# Altium PCB UKU208_.PcbDoc
Units mm, origin at the board's own origin, x right, y up, seen from the top; angles counter-clockwise.
Board outline 222.4 x 162.3 mm, 2 copper layers (Top Layer, Bottom Layer); 42 components, 78 nets, 138 pads, 0 vias.
Unrouted connection lines stored in the file: 93.
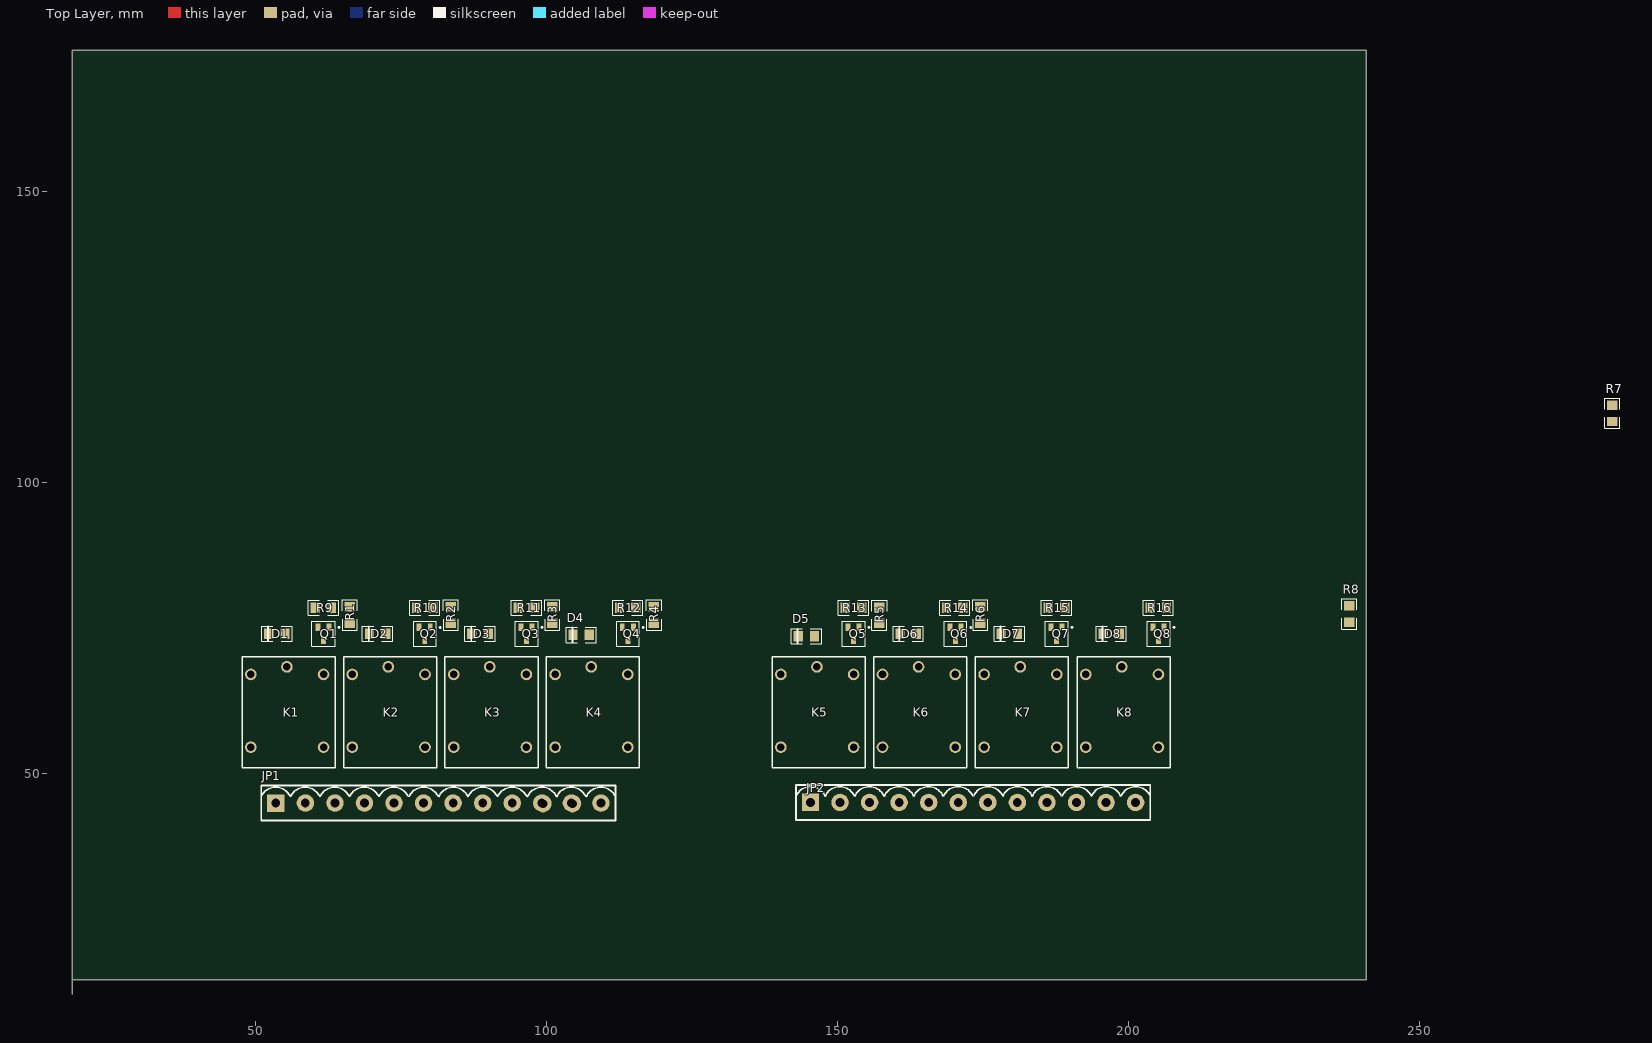
[diagram p0: Top Layer view]
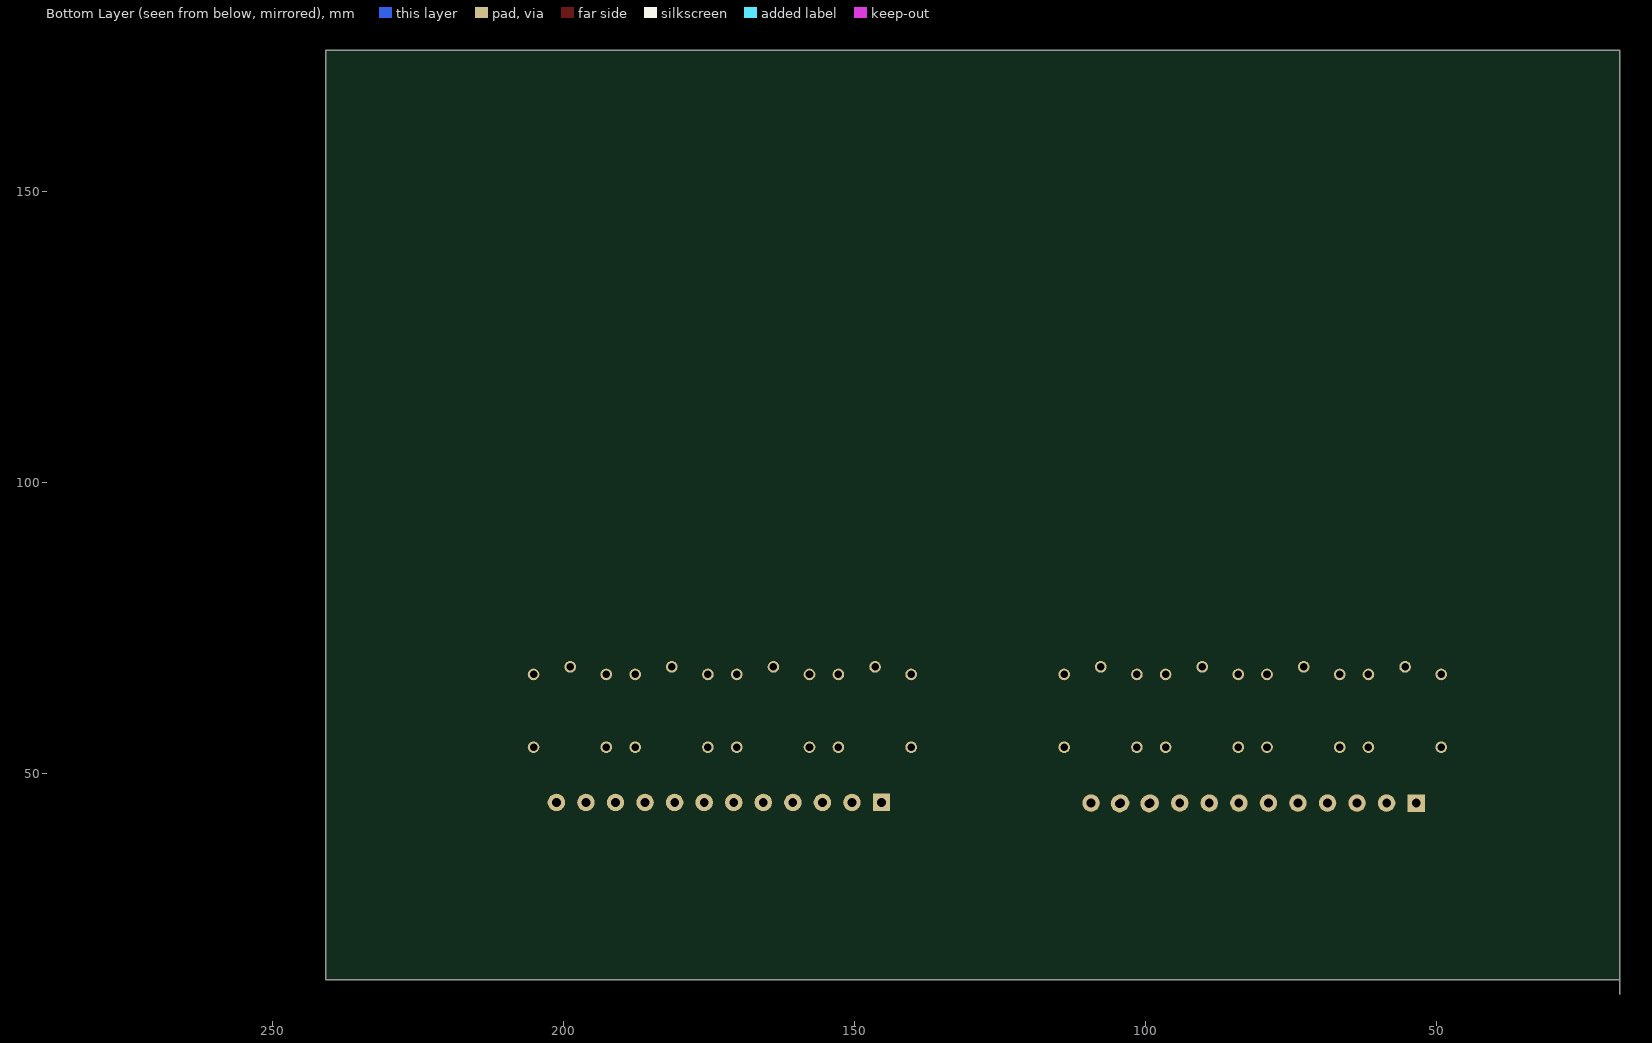
[diagram p1: Bottom Layer view, seen from below]

## Layer stack, top to bottom
Top Layer: signal copper 0.0356
Dielectric: dielectric 0.32, FR-4, Dk 4.8
Bottom Layer: signal copper 0.0356

## Board outline
18.5,12 18.5,174.3 240.9,174.3 240.9,14.5 18.5,14.5

## Design rules (kind name [scope] priority, off if disabled: settings)
Clearance [All] p1: gap=0.254
ComponentClearance [All] p1: gap=0.254 collisioncheckmode=0
PolygonConnect [All] p1: connectstyle=Relief reliefconductorwidth=0.254 reliefentries=4 polygonreliefangle="90 Angle"
RoomDefinition UKU208_main [InComponentClass('UKU208_main')] p1: confinementstyle=ConfineIn formatcopy=TRUE outline 0,0 50.8,0 50.8,25.4 0,25.4
RoutingLayers [All] p1: top layer=Horizontal bottom layer=Vertical
RoutingVias [All] p1: holewidth=0.711 width=1.27 viastyle="Through Hole" minholewidth=0.711 minwidth=1.27 maxholewidth=0.711 maxwidth=1.27
SolderMaskExpansion [All] p1: expansion=0.102
TestPointUsage [All] p1: valid=0 allowmultiple=FALSE
Testpoint [All] p1: side=15 testpointundercomponent=TRUE minsize=1.016 maxsize=2.54 preferedsize=1.524 minholesize=0 maxholesize=1.016 preferedholesize=0.813 testpointgrid=0.025 style=1023 order=-539222988
Width [All] p1: maxlimit=0.254 minlimit=0.254 preferedwidth=0.254
16 further rules are at their usual default settings.

## Components (designator, comment, footprint, x,y, rotation, side; value= is the part's Value field where it differs from the comment)
D1 "BAV103" _1206d 53.7,74 r0 top
D2 "BAV103" _1206d 71,74 r0 top
D3 "BAV103" _1206d 88.6,74 r0 top
D4 "BAV103" _1206d 106,73.801 r0 top
D5 "BAV103" _1206d 144.7,73.6 r0 top
D6 "BAV103" _1206d 162.2,74 r0 top (schematic designator D?)
D7 "BAV103" _1206d 179.6,74 r0 top
D8 "BAV103" _1206d 197.1,74 r0 top (schematic designator D?)
JP1 "MHDR1X12" 2EDG-5.08-12P 53.5,44.9 r0 top
JP2 "MHDR1X12" 2EDG-5.08-12P 145.4,45 r0 top
K1 "BS115" bs115 61.7,67 r180 top (schematic designator K?)
K2 "BS115" bs115 79.133,67 r180 top (schematic designator K?)
K3 "BS115" bs115 96.567,67 r180 top (schematic designator K?)
K4 "BS115" bs115 114,67 r180 top (schematic designator K?)
K5 "BS115" bs115 152.8,67 r180 top (schematic designator K?)
K6 "BS115" bs115 170.267,67 r180 top (schematic designator K?)
K7 "BS115" bs115 187.733,67 r180 top (schematic designator K?)
K8 "BS115" bs115 205.2,67 r180 top (schematic designator K?)
Q1 "BC846" SO-G3#1 61.7,74 r180 top
Q2 "BC846" SO-G3#2 79.1,74 r180 top (schematic designator Q?)
Q3 "BC846" SO-G3#2 96.6,74 r180 top (schematic designator Q?)
Q4 "BC846" SO-G3#2 114,74 r180 top (schematic designator Q?)
Q5 "BC846" SO-G3#2 152.8,74 r180 top (schematic designator Q?)
Q6 "BC846" SO-G3#2 170.3,74 r180 top (schematic designator Q?)
Q7 "BC846" SO-G3#2 187.7,74 r180 top (schematic designator Q?)
Q8 "BC846" SO-G3#2 205.2,74 r180 top (schematic designator Q?)
R1 "1K0" _1206#1 66.2,77.2 r270 top
R2 "1K0" _1206#1 83.6,77.2 r270 top (schematic designator R?)
R3 "1K0" _1206#1 101,77.2 r270 top (schematic designator R?)
R4 "1K0" _1206#2 118.5,77.2 r270 top (schematic designator R?)
R5 "1K0" _1206#1 157.2,77.2 r90 top (schematic designator R?)
R6 "1K0" _1206#1 174.6,77.2 r270 top (schematic designator R?)
R7 "1K0" _1206#1 283.2,111.9 r90 top
R8 "1K0" _1206#1 238,77.4 r90 top
R9 "10K" _1206#1 61.7,78.5 r0 top
R10 "10K" _1206#1 79.1,78.5 r0 top (schematic designator R?)
R11 "10K" _1206#1 96.6,78.5 r0 top (schematic designator R?)
R12 "10K" _1206#1 114,78.5 r0 top (schematic designator R?)
R13 "10K" _1206#1 152.8,78.5 r0 top (schematic designator R?)
R14 "10K" _1206#1 170.2,78.5 r0 top (schematic designator R?)
R15 "10K" _1206#1 187.7,78.5 r0 top (schematic designator R?)
R16 "10K" _1206#1 205.2,78.5 r0 top (schematic designator R?)

## Footprints (in the part's own frame and the unit in brackets; to place one, negate y for a bottom-side part, rotate by r counter-clockwise, add the part's x,y. Pads: shape width x height; smd on the part's side, far side on the other; paste and mask are expansions set on the pad)
2EDG-5.08-12P [mm]
  rect 3x3 hole 1.5: 1(0,0)
  round 3 hole 1.5: 2(5.08,0) 3(10.16,0) 4(15.24,0) 5(20.32,0) 6(25.4,0) 7(30.48,0) 8(35.56,0) 9(40.64,0) 10(45.72,0) 11(50.8,0) 12(55.88,0)
  silkscreen extent -2.5,-3 58.4,3
_1206#1 [mm]
  rect 1.6x1.8 smd: 1(-1.412,-0.007) 2(1.388,-0.007)
  silkscreen extent -2.61,-1.31 2.59,1.29
_1206#2 [mm]
  rect 1.6x1.8 smd: 1(-1.412,-0.007) 2(1.388,-0.007)
  round 3 hole 1.5: 10(32.4,-19.08) 11(32.4,-14)
  silkscreen extent -2.61,-1.31 2.59,1.29
_1206d [mm]
  rect 1.6x1.8 smd: 1(1.395,-0.009) 2(-1.405,-0.009)
  silkscreen extent -2.6,-1.31 2.6,1.29
bs115 [mm]
  round 2 hole 1.3: 1(6.292,-1.304) 2(-0.008,12.496) 3(12.492,12.496) 4(-0.008,-0.004) 5(12.492,-0.004)
  silkscreen extent -2.01,-3 13.99,16
SO-G3#1 [mm]
  rect 0.85x1.3 smd: 1(-0.948,-1.102) 2(0.952,-1.102) 3(0.002,1.098)
  silkscreen extent -2.77,-2.15 2,2.15
SO-G3#2 [mm]
  rect 0.85x1.3 smd: 1(-0.95,-1.1) 2(0.95,-1.1) 3(0,1.1)
  silkscreen extent -2.78,-2.15 2,2.15

## Part data
D1 D2 D3 D4 D5 D6 D7 D8: library part Diode, "Diode"
JP1 JP2: "Header, 12-Pin"
K1 K2 K3 K4 K5 K6 K7 K8: "Single-Pole Dual-Throw Relay"
Q1 Q2 Q3 Q4 Q5 Q6 Q7 Q8: library part GT122, "Bipolar transistor"
R1 R2 R3 R4 R5 R6 R7 R8 R9 R10 R11 R12 R13 R14 R15 R16: library part Res2, "Resistor"

## Nets (pads, with @x,y where several pads share a name; then routed paths per layer and width w, separated by ;. In a path a pad name is that pad's centre, name@x,y a point inside that pad or via, vN(x,y) a via of type N, cw(c..) or ccw(c..) an arc to the next point about the centre after c; other vN are vias at no path point)
+5V: D1.2 D2.2 D3.2 D4.2 D5.2 D6.2 D7.2 D8.2 K1.5 K2.5 K3.5 K4.5 K5.5 K6.5 K7.5 K8.5
GND: Q1.2 Q2.2 Q3.2 Q4.2 Q5.2 Q6.2 Q7.2 Q8.2 R9.1 R10.1 R11.1 R12.1 R13.1 R14.1 R15.1 R16.1
NetD1_1: D1.1 K1.4 Q1.3
NetD2_1: D2.1 K2.4 Q2.3
NetD3_1: D3.1 K3.4 Q3.3
NetD4_1: D4.1 K4.4 Q4.3
NetD5_1: D5.1 K5.4 Q5.3
NetD6_1: D6.1 K6.4 Q6.3
NetD7_1: D7.1 K7.4 Q7.3
NetD8_1: D8.1 K8.4 Q8.3
NetD?_1: 
NetD?_1: 
NetD?_1: 
NetD?_1: 
NetD?_1: 
NetD?_1: 
NetD?_1: 
NetJP1_1: JP1.1 K1.3
NetJP1_2: JP1.2 K1.1
NetJP1_3: JP1.3 K1.2
NetJP1_4: JP1.4 K2.3
NetJP1_5: JP1.5 K2.1
NetJP1_6: JP1.6 K2.2
NetJP1_7: JP1.7 K3.3
NetJP1_8: JP1.8 K3.1
NetJP1_9: JP1.9 K3.2
NetJP1_10: JP1.10 K4.3
NetJP1_11: JP1.11 K4.1
NetJP1_12: JP1.12 K4.2
NetJP2_1: JP2.1 K5.3
NetJP2_2: JP2.2 K5.1
NetJP2_3: JP2.3 K5.2
NetJP2_4: JP2.4 K6.3
NetJP2_5: JP2.5 K6.1
NetJP2_6: JP2.6 K6.2
NetJP2_7: JP2.7 K7.3
NetJP2_8: JP2.8 K7.1
NetJP2_9: JP2.9 K7.2
NetJP2_10: JP2.10 K8.3
NetJP2_11: JP2.11 K8.1
NetJP2_12: JP2.12 K8.2
NetJP?_1: 
NetJP?_1: 
NetJP?_1: 
NetJP?_1: 
NetJP?_1: 
NetJP?_1: 
NetJP?_1: 
NetJP?_2: 
NetJP?_2: 
NetJP?_2: 
NetJP?_2: 
NetJP?_2: 
NetJP?_2: 
NetJP?_2: 
NetJP?_3: 
NetJP?_3: 
NetJP?_3: 
NetJP?_3: 
NetJP?_3: 
NetJP?_3: 
NetJP?_3: 
NetQ1_1: Q1.1 R1.2 R9.2
NetQ2_1: Q2.1 R2.2 R10.2
NetQ3_1: Q3.1 R3.2 R11.2
NetQ4_1: Q4.1 R4.2 R12.2
NetQ5_1: Q5.1 R5.2 R13.2
NetQ6_1: Q6.1 R6.2 R14.2
NetQ7_1: Q7.1 R7.2 R15.2
NetQ8_1: Q8.1 R8.2 R16.2
NetQ?_1: 
NetQ?_1: 
NetQ?_1: 
NetQ?_1: 
NetQ?_1: 
NetQ?_1: 
NetQ?_1: 
P1_31: R1.1 R2.1 R3.1 R4.1 R5.1 R6.1 R7.1 R8.1
pads on no net: R4.10 R4.11

## Silkscreen, mask and mechanical layers (free items; w line width, h text height)
Mechanical 1:
  circle w0.254: c35,130 r1.5
  circle w0.254: c35,50 r1.5
  circle w0.254: c220,50 r1.5
  circle w0.254: c220,130 r1.5
  lines w0.254: 40,40 215,40 215,140 40,140 40,40 ; 72.5,95 72.5,115 77.5,115 77.5,95 72.5,95